# Altium PCB CAN_Bus_v2.PcbDoc
Units mm, origin at the board's own origin, x right, y up, seen from the top; angles counter-clockwise.
Board outline 32 x 88 mm, 2 copper layers (Top Layer, Bottom Layer), stack 0.532 mm thick; 10 components, 12 nets, 64 pads, 0 vias.
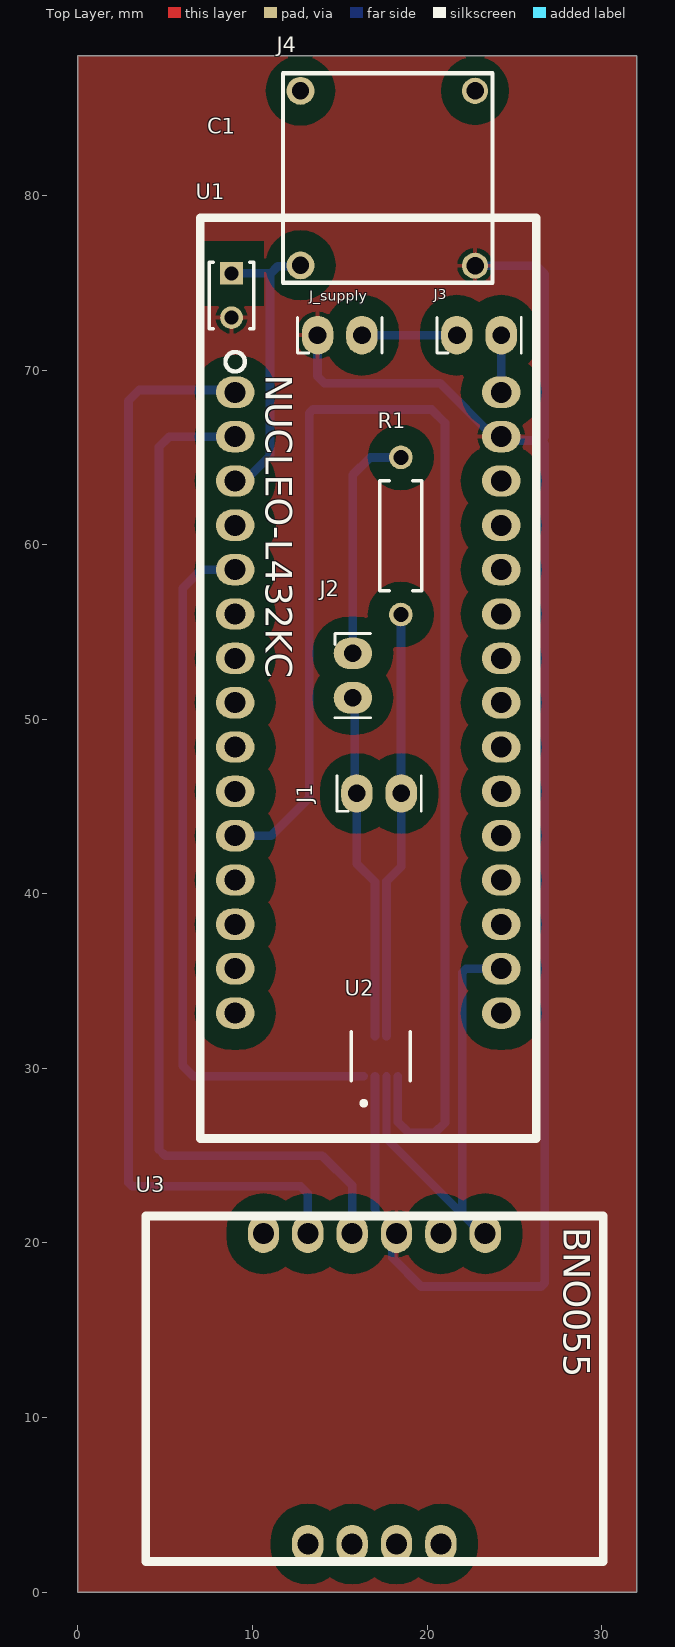
[diagram p0: Top Layer view]
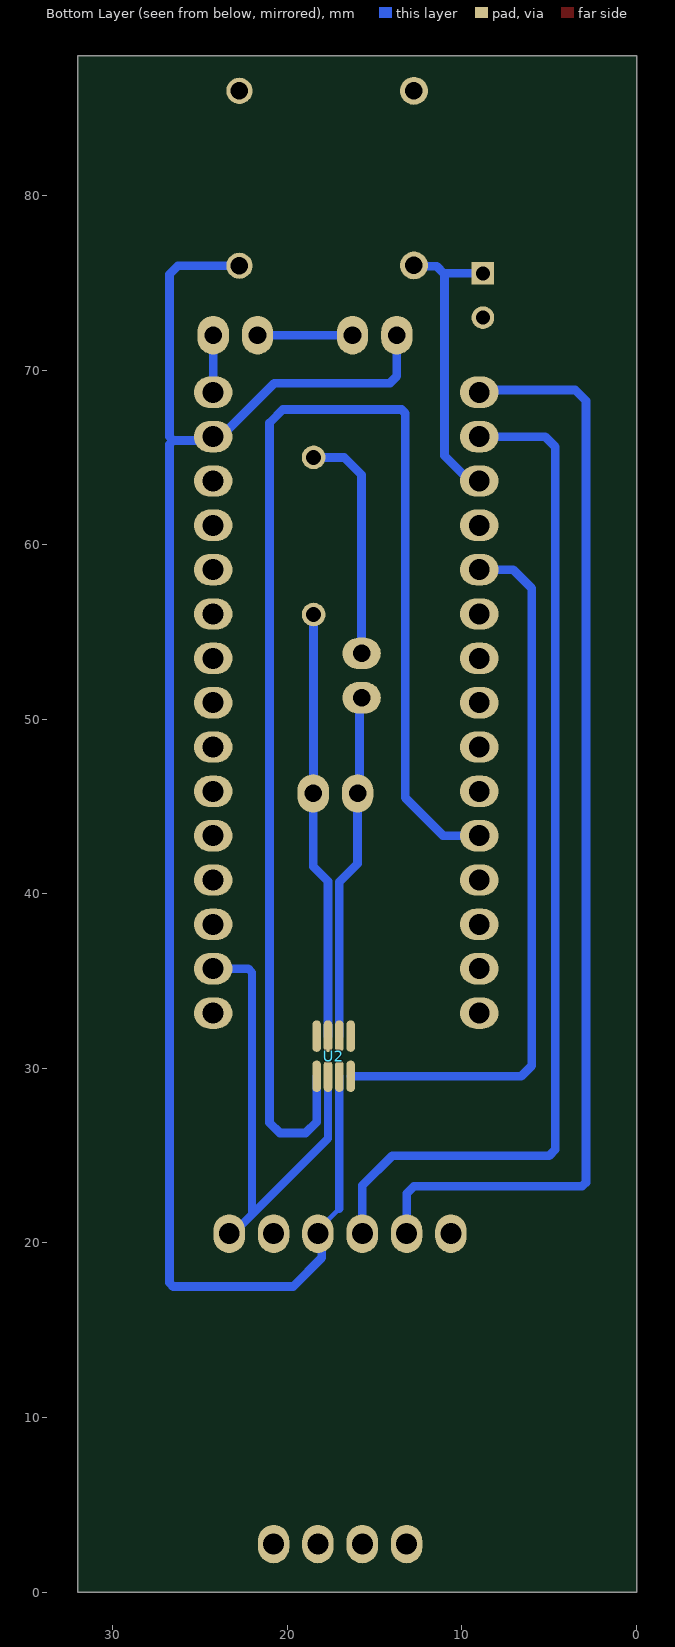
[diagram p1: Bottom Layer view, seen from below]

## Layer stack, top to bottom
Top Solder: solder mask 0.0254, SM-001, Dk 4
Top Layer: signal copper 0.035
Dielectric 2: prepreg 0.0711, PP-006, Dk 4.1
Dielectric 1: dielectric 0.32, FR-4, Dk 4.8
Dielectric 3: prepreg 0.0711, PP-006, Dk 4.1
Bottom Layer: signal copper 0.035
Bottom Solder: solder mask 0.0254, SM-001, Dk 4

## Board outline
0,0 32,0 32,88 0,88

## Design rules (kind name [scope] priority, off if disabled: settings)
Clearance [All] p1: gap=0.25 ignorepadtopadclearanceinfootprint=FALSE except(0.15: THPad-THPad; 1.2: SMDPad-Fill SMDPad-Poly SMDPad-Region THPad-Fill THPad-Poly THPad-Region)
MinimumSolderMaskSliver [All] p1: minsoldermaskwidth=0.15
PlaneConnect [All] p1: pad.planeconnectstyle=Relief pad.reliefexpansion=0.254 pad.reliefentries=4 pad.reliefconductorwidth=0.254 pad.reliefairgap=0.254 via.planeconnectstyle=Direct via.reliefexpansion=0.508 via.reliefentries=4 via.reliefconductorwidth=0.254 via.reliefairgap=0.254
PolygonConnect [All] p1: connectstyle=Relief reliefconductorwidth=0.254 reliefentries=4 polygonreliefangle="90 Angle" airgapwidth=0.254
RoutingVias [All] p1: holewidth=0.6 width=1 viastyle="Through Hole" minholewidth=0.6 minwidth=1 maxholewidth=0.6 maxwidth=1
SilkToSolderMaskClearance [IsText] p1: minsilkscreentomaskgap=0.254 clearancetoexposedcopper=TRUE
SolderMaskExpansion [All] p1: expansion=0.22 istentingtop=FALSE
Width Width_Power [(InNet('VCC_USB') OR InNet('GND'))] p1: maxlimit=0.5 minlimit=0.25 preferedwidth=0.5
Width [All] p2: maxlimit=1 minlimit=0.2 preferedwidth=0.254
27 further rules are at their usual default settings.

## Components (designator, comment, footprint, x,y, rotation, side; value= is the part's Value field where it differs from the comment)
C1 "ceramic_capacitor_throughhole" KEMT-C315-THT-2 8.8,74.275 r270 top value=0.1µF
J1 "Goldpin_1x02" HDRV2W63P254_1x02#1 17.25,45.75 r0 top
J2 "Goldpin_1x02" HDRV2W63P254_1x02#1 15.75,52.5 r270 top
J3 "Goldpin_1x02" HDRV2W63P254_1x02#2 22.98,72 r0 top
J4 "push_button2x02" push_button2x02 22.75,76 r90 top
J_supply "Goldpin_1x02" HDRV2W63P254_1x02#2 15,72 r0 top
R1 "MFR-25FBF52-2K21" RESA60-630X240 18.5,60.5 r270 top value=120
U1 "NUCLEO-L432KC" NUCLEO-L432KC 9.01,68.73 r0 top
U2 "TCAN332" FP-DCN0008A-IPC_A 17.35,30.7 r90 top
U3 "BNO055_Adafruit" BNO055_Adafruit 20.79,2.75 r180 top

## Footprints (in the part's own frame and the unit in brackets; to place one, negate y for a bottom-side part, rotate by r counter-clockwise, add the part's x,y. Pads: shape width x height; smd on the part's side, far side on the other; paste and mask are expansions set on the pad)
BNO055_Adafruit [mm]
  oval 1.8x2.2 hole 1.2: 1(0,0) 2(2.54,0) 3(5.08,0) 4(7.62,0) 5(-2.54,-17.78) 6(0,-17.78) 7(2.54,-17.78) 8(5.08,-17.78) 9(7.62,-17.78) 10(10.16,-17.78)
  silkscreen extent -9.3,-18.8 16.9,1, body extent -9.53,-19.05 17.15,1.27, height 6.23
FP-DCN0008A-IPC_A [mm]
  oval 1.805x0.495 smd far side paste+0 mask+0: 1(-1.15,0.975)
  rrect100% 1.805x0.495 smd far side paste+0 mask+0: 2(-1.15,0.325) 3(-1.15,-0.325) 4(-1.15,-0.975) 5(1.15,-0.975) 6(1.15,-0.325) 7(1.15,0.325) 8(1.15,0.975)
  silkscreen extent -2.82,-1.7 1.4,1.7, body extent -2.55,-1.95 2.55,1.95, height 0.25
HDRV2W63P254_1x02#1 [mm]
  oval 1.8x2.2 hole 1: 1(-1.27,0) 2(1.27,0)
  silkscreen extent -2.41,-1.02 2.41,1.02
HDRV2W63P254_1x02#2 [mm]
  oval 1.8x2.2 hole 1.02: 1(-1.27,0) 2(1.27,0)
  silkscreen extent -2.41,-1.02 2.41,1.02
KEMT-C315-THT-2 [mm] "THD, 2-Leads, Body 3.81x2.54mm"
  rect 1.3x1.3 hole 0.8: 1(-1.27,0)
  round 1.3 hole 0.8: 2(1.27,0)
  silkscreen extent -1.91,-1.27 1.91,1.27, body extent -1.91,-1.27 1.91,1.27, height 4.66
NUCLEO-L432KC [mm]
  oval 2.2x1.8 hole 1.2: 1(0,0) 2(0,-2.54) 3(0,-5.08) 4(0,-7.62) 5(0,-10.16) 6(0,-12.7) 7(0,-15.24) 8(0,-17.78) 9(0,-20.32) 10(0,-22.86) 11(0,-25.4) 12(0,-27.94) 13(0,-30.48) 14(0,-33.02) 15(0,-35.56) 16(15.24,0) 17(15.24,-2.54) 18(15.24,-5.08) 19(15.24,-7.62) 20(15.24,-10.16) 21(15.24,-12.7) 22(15.24,-15.24) 23(15.24,-17.78) 24(15.24,-20.32) 25(15.24,-22.86) 26(15.24,-25.4) 27(15.24,-27.94) 28(15.24,-30.48) 29(15.24,-33.02) 30(15.24,-35.56)
  silkscreen extent -2,-42.75 17.25,10, body extent -1.65,-42.33 16.89,9.67, height 16.5
push_button2x02 [mm]
  round 1.5 hole 1: 1(-0.02,0) 2(10,0)
  round 1.6 hole 1: 3(10,10) 4(0,10)
  silkscreen extent -1,-1 11,11
RESA60-630X240 [mm] "Axial Resistor, 2-Leads, Dia 2.4mm, Body Length 6.3mm"
  round 1.35 hole 0.85: 1(-4.5,0) 2(4.5,0)
  silkscreen extent -3.15,-1.2 3.15,1.2, body extent -4.77,-1.19 4.77,1.2, height 2.4

## Part data
C1: library part CMP-001-00084-1, "Ceramic Capacitor, Multilayer, Ceramic, 200V, 5% +Tol, 5% -Tol, C0G, 30ppm/Cel TC, 0.00001uF, Through Hole Mount", Capacitor Type=Ceramic, Case/Package=1510, Max Operating Temperature=125°C, Min Operating Temperature=-55°C, Package Shape=Rectangular, Package Style=RadialMeter, Rated DC Voltage (URdc)=200V, Temperature Characteristics Code=C0G, Tolerance  (fill in as +-)=5%, Dielectric Material=Ceramic, Height=5.33mm, JESD-609 Code=e3, Length=3.81mm, Mounting Technology="Through Hole", Multilayer=Yes, Packaging=Bulk, Pins=2, Reach SVHC Compliant=Yes, RoHS Compliant=Yes, Terminal Finish=Nickel, Terminal Pitch=2.54mm, Termination=Wire, Tolerance (fill in as +-)=5%, Width=2.54mm
R1: library part CMP-009-00054-4, "Axial Resistor, 2.21 KOhm, +/- 1%, 0.25 W, -55 to 155 degC, 2-Pin THD, RoHS, Bulk", Case/Package=Axial, Manufacturer=Yageo, Max Operating Temperature=155°C, Min Operating Temperature=-55°C, Package Description="2-Pin Axial Lead, Dia 2.4 mm, Body Length 6.3 mm", Package Quantity=200, Package Reference=MFR-25, Power=250mW, Tolerance=1%, Voltage Rating=250V, Datasheet URL=http://www.yageo.com/documents/recent/Yageo%20LR_MFR_2013.pdf, Datasheet Version=Apr-13, Manufacturer URL=http://www.yageo.com/, Mounting Technology=TH, Packaging=Bulk, RoHS Compliant=True
U1: "Arm® Cortex®-M4 32-bit MCU, 24 MHz, 256 KB Flash", HelpURL=https://www.st.com/en/evaluation-tools/nucleo-l432kc.html, PN=NUCLEO-L432KC
U2: library part CMP-015-00008-1, "Interface Circuit, PDSO8, CAN Transceiver", Case/Package=LSSOP, Max Operating Temperature=125°C, Min Operating Temperature=-40°C, Nominal Supply Voltage=3.3V, Package Body Material=Plastic, Package Shape=Rectangular, Package Style="SMALL OUTLINE, LOW PROFILE, SHRINK PITCHMeter", Temperature Grade=AUTOMOTIVE, Channels=1, Height - Seated (Max)=1.45mm, JESD-30 Code=R-PDSO-G8, JESD-609 Code=e4, Length=2.9mm, Moisture Sensitivity Level=1, Pins=8, Reach SVHC Compliant=Yes, RoHS Compliant=Yes, Surface Mount=Yes, Telecom IC Type="INTERFACE CIRCUIT", Terminal Finish=Nickel, Terminal Form="Gull Wing", Terminal Pitch=0.65mm, Terminal Position=DUAL, Width=1.6mm
U3: "Adafruit BNO055 9-dof IMU sensor"

## Nets (pads, with @x,y where several pads share a name; then routed paths per layer and width w, separated by ;. In a path a pad name is that pad's centre, name@x,y a point inside that pad or via, vN(x,y) a via of type N, cw(c..) or ccw(c..) an arc to the next point about the centre after c; other vN are vias at no path point)
3V3: U1.29 U2.3 U3.5 | length 27.7
  Bottom Layer w0.475: U2.3 17.675,25.985 22.025,21.635 ; U3.5 23.13,20.53 22.025,21.635 ; U1.29 22.237,35.71 22.025,35.498 22.025,21.635
CANH: J1.1 J2.2 U2.7 | length 19.9
  Bottom Layer w0.5: J2.2@15.74,51.22 J2.2 15.865,51.115 15.865,45.865 J1.1 15.98,41.72 17.025,40.675 U2.7
CANL: J1.2 R1.2 U2.6 | length 24.7
  Bottom Layer w0.5: U2.6 17.675,40.725 18.52,41.57 J1.2 18.51,45.76 18.51,55.99 R1.2 R1.2@18.385,55.885
GND: C1.2 J4.1 J_supply.1 U1.17 U2.2 U3.7 | length 99.3
  Bottom Layer w0.254: 17.025,21.955 18.25,20.73 U3.7
  Bottom Layer w0.5: J_supply.1 13.73,69.648 14.128,69.25 20.75,69.25 23.81,66.19 U1.17 24.47,65.97 26.53,65.97 ; 17.025,21.955 U2.2 ; U3.7 18.025,20.305 18.025,19.15 19.675,17.5 26.53,17.5 26.75,17.72 26.75,65.751 26.53,65.97 ; J4.1 26.27,75.98 26.75,75.5 26.75,66.19 26.53,65.97
NetC1_1: C1.1 J4.4 U1.3 | length 17.5
  Bottom Layer w0.5: C1.1 10.955,75.545 11,75.5 ; U1.3 9.562,63.65 11,65.088 11,75.5 ; J4.4@12.452,76 J4.4 12.7,75.95 11.45,75.95 11,75.5
NetJ2_1: J2.1 R1.1 | length 13.4
  Bottom Layer w0.5: J2.1 15.75,64 16.75,65 R1.1
NetJ3_2: J3.2 U1.16 | length 3.4
  Bottom Layer w0.5: U1.16@24.28,68.76 U1.16 J3.2 J3.2@24.285,72.035
NetU1_1: U1.1 U3.9 | length 64
  Bottom Layer w0.5: U1.1 8.88,68.86 3.51,68.86 2.899,68.249 2.899,23.47 3.118,23.25 12.75,23.25 13.17,22.83 U3.9
NetU1_2: U1.2 U3.8 | length 59.5
  Bottom Layer w0.5: U1.2 5.232,66.19 4.65,65.608 4.65,25.35 5,25 14,25 15.71,23.29 U3.8
NetU1_5: U1.5 U2.1 | length 41.4
  Bottom Layer w0.5: U1.5 7.07,58.57 6,57.5 6,30.149 6.599,29.55 U2.1
NetU1_11: U1.11 U2.4 | length 81.3
  Bottom Layer w0.5: U1.11 11.08,43.33 13.25,45.5 13.25,67.53 13.47,67.75 20.25,67.75 21.025,66.975 21.025,26.886 20.445,26.305 18.945,26.305 18.325,26.925 U2.4
VCC: J3.1 J_supply.2 | length 5.4
  Bottom Layer w0.5: J_supply.2 J3.1
pads on no net: J4.2 J4.3 U1.4 U1.6 U1.7 U1.8 U1.9 U1.10 U1.12 U1.13 U1.14 U1.15 U1.18 U1.19 U1.20 U1.21 U1.22 U1.23 U1.24 U1.25 U1.26 U1.27 U1.28 U1.30 U2.5 U2.8 U3.1 U3.2 U3.3 U3.4 U3.6 U3.10

## Polygon pours and split planes (outlines as drawn)
GND on Top Layer "GND_L01_P001" (solid, pour order 1): 0,0 32,0 32,88 0,88

## Silkscreen, mask and mechanical layers (free items; w line width, h text height)
Board Shape:
  the board outline again, w0.254

## Text inside footprints (layer, text, board x,y; h text height)
U3: Top Overlay "BNO055" at 27.844,20.896 h1.52 r270